# EAGLE board NOVASTACK Adapter V0.2 (EAGLE 9.5.1)
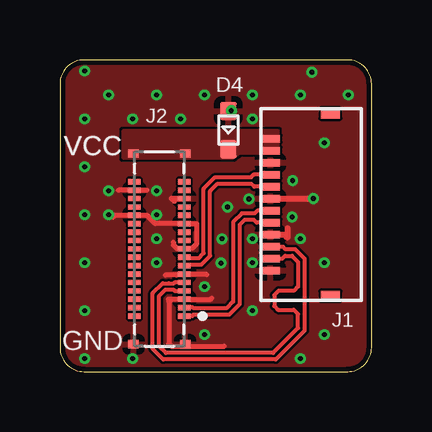
[diagram p0: board, top side]
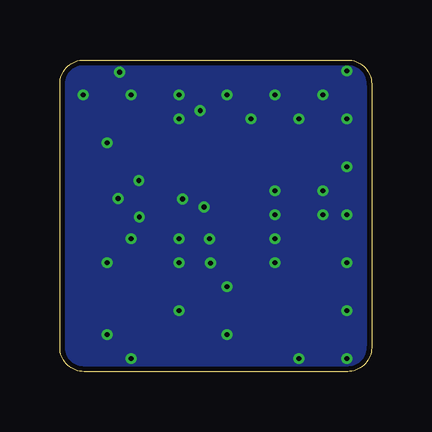
[diagram p1: board, bottom side, seen from below]

Size 13 x 13 mm. Coordinates in mm from the lower left corner, seen from the top.
Outline: 0,1 arc90 1,0 12,0 arc90 13,1 13,12 arc90 12,13 1,13 arc90 0,12 0,1
Copper layers (1*16): Top 0.035mm / dielectric 0.73mm / Bottom 0.035mm
Design rules "NOA Eagle Rule *": minimum track width 4mil, minimum drill 0.2mm, track to track 4mil, track to pad 4mil, pad to pad 4mil, via to via 4mil, smd to smd 0mil, copper to edge 8mil, drill to drill 10mil, minimum pad ring 5mil, minimum via ring 5mil, stop-mask expansion 2mil, vias tented up to drill 25mil, thermal gap 10mil
Net classes: 1 Diff: width 0.282 mm, drill 0.2 mm, clearance 0.508 mm to class 0, clearance 0.102 mm

## Footprints (pad centres in the part's own frame; a part is rotated, then mirrored left to right if it is on the bottom)
SOD523 = smd 0.762 x 0.7: + 0.8,0; - -0.8,0
FPC-0.5-12P = smd 0.3 x 0.8: 1 -2.75,0; 2 -2.25,0; 3 -1.75,0; 4 -1.25,0; 5 -0.75,0; 6 -0.25,0; 7 0.25,0; 8 0.75,0; 9 1.25,0; 10 1.75,0; 11 2.25,0; 12 2.75,0 | smd 0.4 x 0.8: P$13 -3.8,-2.5; P$14 3.8,-2.5
IPEX_20709-034E-01 = smd 0.22 x 0.51: 1 -2.8,-1.045; 2 -2.8,1.045; 3 -2.45,-1.045; 4 -2.45,1.045; 5 -2.1,-1.045; 6 -2.1,1.045; 7 -1.75,-1.045; 8 -1.75,1.045; 9 -1.4,-1.045; 10 -1.4,1.045; 11 -1.05,-1.045; 12 -1.05,1.045; 13 -0.7,-1.045; 14 -0.7,1.045; 15 -0.35,-1.045; 16 -0.35,1.045; 17 0,-1.045; 18 0,1.045; 19 0.35,-1.045; 20 0.35,1.045; 21 0.7,-1.045; 22 0.7,1.045; 23 1.05,-1.045; 24 1.05,1.045; 25 1.4,-1.045; 26 1.4,1.045; 27 1.75,-1.045; 28 1.75,1.045; 29 2.1,-1.045; 30 2.1,1.045; 31 2.45,-1.045; 32 2.45,1.045; 33 2.8,-1.045; 34 2.8,1.045 | smd 0.35 x 0.44: 35 3.975,-1.08; 36 3.975,1.08; 37 -3.975,-1.08; 38 -3.975,1.08

## Placement (x,y rotation side)
D4  ESD5Z6.0T1G  [SOD523]  7.03,10.07 90 top
J1  FPC-0.5-12PFPC-0.5-12P  [FPC-0.5-12P]  8.78,6.96 90 top
J2  20709-034E-01  [IPEX_20709-034E-01]  4.15,5.12 90 top

## Library data of the parts
D4 = Discrete_NOA
J1 = Connector_NOA
J2 = Connector_NOA; AVAILABILITY: Unavailable; DESCRIPTION: 0.35 mm pitch, 0.7 mm height, 2.3 mm depth, robust type with power pin; MF: I-PEX; MP: 20709-034E-01; PACKAGE: None; PRICE: None

## Nets
GND: D4.+ J1.1 J1.4 J1.7 J1.10 J2.5 J2.11 J2.17 J2.23 J2.26 J2.29 J2.32 J2.37 J2.38
USB2_N: J1.9 J2.15
USB2_P: J1.8 J2.13
USB3RX_N: J1.6 J2.3
USB3RX_P: J1.5 J2.1
USB3TX_N: J1.3 J2.9
USB3TX_P: J1.2 J2.7
VBUS3: D4.- J1.11 J1.12 J2.35 J2.36

## Tracks (layer width: path | path; a pad name or v marks a point on that pad's centre or on a via)
GND  (via drill 0.2)
  Top 0.102: J2.17 5.18,5.13 4.95,5.13 4.73,5.34 | 4.65,7.22 4.65,7.15 4.73,7.06 4.8,7.06 4.87,7.13 5.1,7.13 J2.29
  Top 0.152: 4.76,7.07 4.65,7.18 4.65,7.22
  Top 0.203: 4.65,3.01 J2.5 6.28,3.02 6.33,3.06 | 4.65,3.01 4.52,3.01 | 4.65,3.01 4.55,2.91 4.55,1.16 4.64,1.06 6.86,1.06 | J2.29 4.65,7.22 | 4.73,5.4 4.73,5.27 4.88,5.13 5.2,5.13 J2.17 5.23,5.15 5.53,5.15 5.71,5.33 5.71,6.17 J2.23 3.98,6.17 3.63,6.52 J2.26 2.29,6.52 2.21,6.44 | 4.4,4.03 4.85,4.03 5.15,4.03 J2.11 6.11,4.07 6.12,4.05 | 2.44,7.56 2.45,7.57 J2.32 3.62,7.57 3.63,7.56
  Top 0.254: J1.4 9.37,5.71 9.48,5.6 9.5,5.6 9.5,5.98 | J1.7 v10.57,7.21 v10.57,7.22
  other vias: 2.03,7.54 2.03,6.54 1.03,8.54 1.03,6.54 1.03,4.54 1.03,2.54 1.03,0.54 1.03,10.54 1.03,12.54 10.51,12.49 11.03,9.54 10.03,5.54 10.03,0.54 11.03,4.54 6.03,1.54 5.03,10.54 3.03,10.54 8.03,10.54 2.03,11.54 7.15,10.89 4.03,4.54 4.03,5.54 4.03,6.54 4.03,7.54 6.03,3.54 8.03,2.54 8.03,4.54 8.03,5.54 6.76,5.54 6.71,4.52 6.99,6.86 7.89,7.2 9.71,7.97 9.69,6.45 4.03,11.54 6.03,11.54 8.03,11.54 10.03,11.54 12.03,11.54 11.03,1.54 3.03,0.54
  pour Top (rank 2): -0.15,14.16 -0.15,-0.34 13.26,-0.34 13.26,13.55 13.26,14.16
  pour Bottom: -0.15,14.16 -0.15,-0.34 13.26,-0.34 13.26,13.55 13.26,14.16
USB2_N
  Top 0.168: J2.15 5.23,4.73 5.78,4.73 6,4.94 6,7.63 6.47,8.11 7.98,8.11 8.08,8.21 J1.9
USB2_P
  Top 0.168: J2.13 5.23,4.46 5.89,4.46 6.27,4.83 6.27,7.52 6.58,7.84 7.98,7.84 8.1,7.71 J1.8
USB3RX_N
  Top 0.168: J1.6 8.23,6.71 8.12,6.6 7.59,6.6 7.23,6.23 7.23,2.92 6.94,2.64 5.58,2.64 5.55,2.67 J2.3
USB3RX_P
  Top 0.168: J1.5 8.21,6.21 8.09,6.33 7.7,6.33 7.5,6.12 7.5,2.81 7.06,2.37 5.57,2.37 5.52,2.32 J2.1
USB3TX_N
  Top 0.168: J1.3 9.3,5.21 9.41,5.1 9.82,5.1 10.2,4.71 10.2,1.71 9,0.51 4.31,0.51 3.87,0.94 3.87,3.27 4.29,3.69 4.55,3.69 4.75,3.69 4.77,3.7 4.78,3.72 J2.9
USB3TX_P
  Top 0.168: J1.2 9.27,4.71 9.39,4.83 9.68,4.83 9.93,4.57 9.93,3.54 9.76,3.37 9.12,3.37 8.94,3.19 8.94,2.73 9.1,2.58 9.76,2.58 9.93,2.4 9.93,1.82 8.89,0.78 4.42,0.78 4.14,1.06 4.14,3.16 4.4,3.42 4.55,3.42 4.74,3.42 4.77,3.39 4.79,3.37 J2.7
VBUS3
  pour Top (no thermals): 2.64,8.93 7.22,8.93 7.34,9.06 7.39,9.06 7.47,9.13 9.1,9.13 9.1,10.02 2.64,10.02

## Text on the board
tPlace: VCC | VCC | GND
Reference: Board 0.8mm / Differential pais trace 11.09mil.